# Altium PCB rev1_0.PcbDoc (part 2 of 2)
Units mm, origin at the board's own origin, x right, y up, seen from the top; angles counter-clockwise.
Board outline 99 x 99 mm, 2 copper layers (Top Layer, Bottom Layer); 120 components, 97 nets, 460 pads, 103 vias.
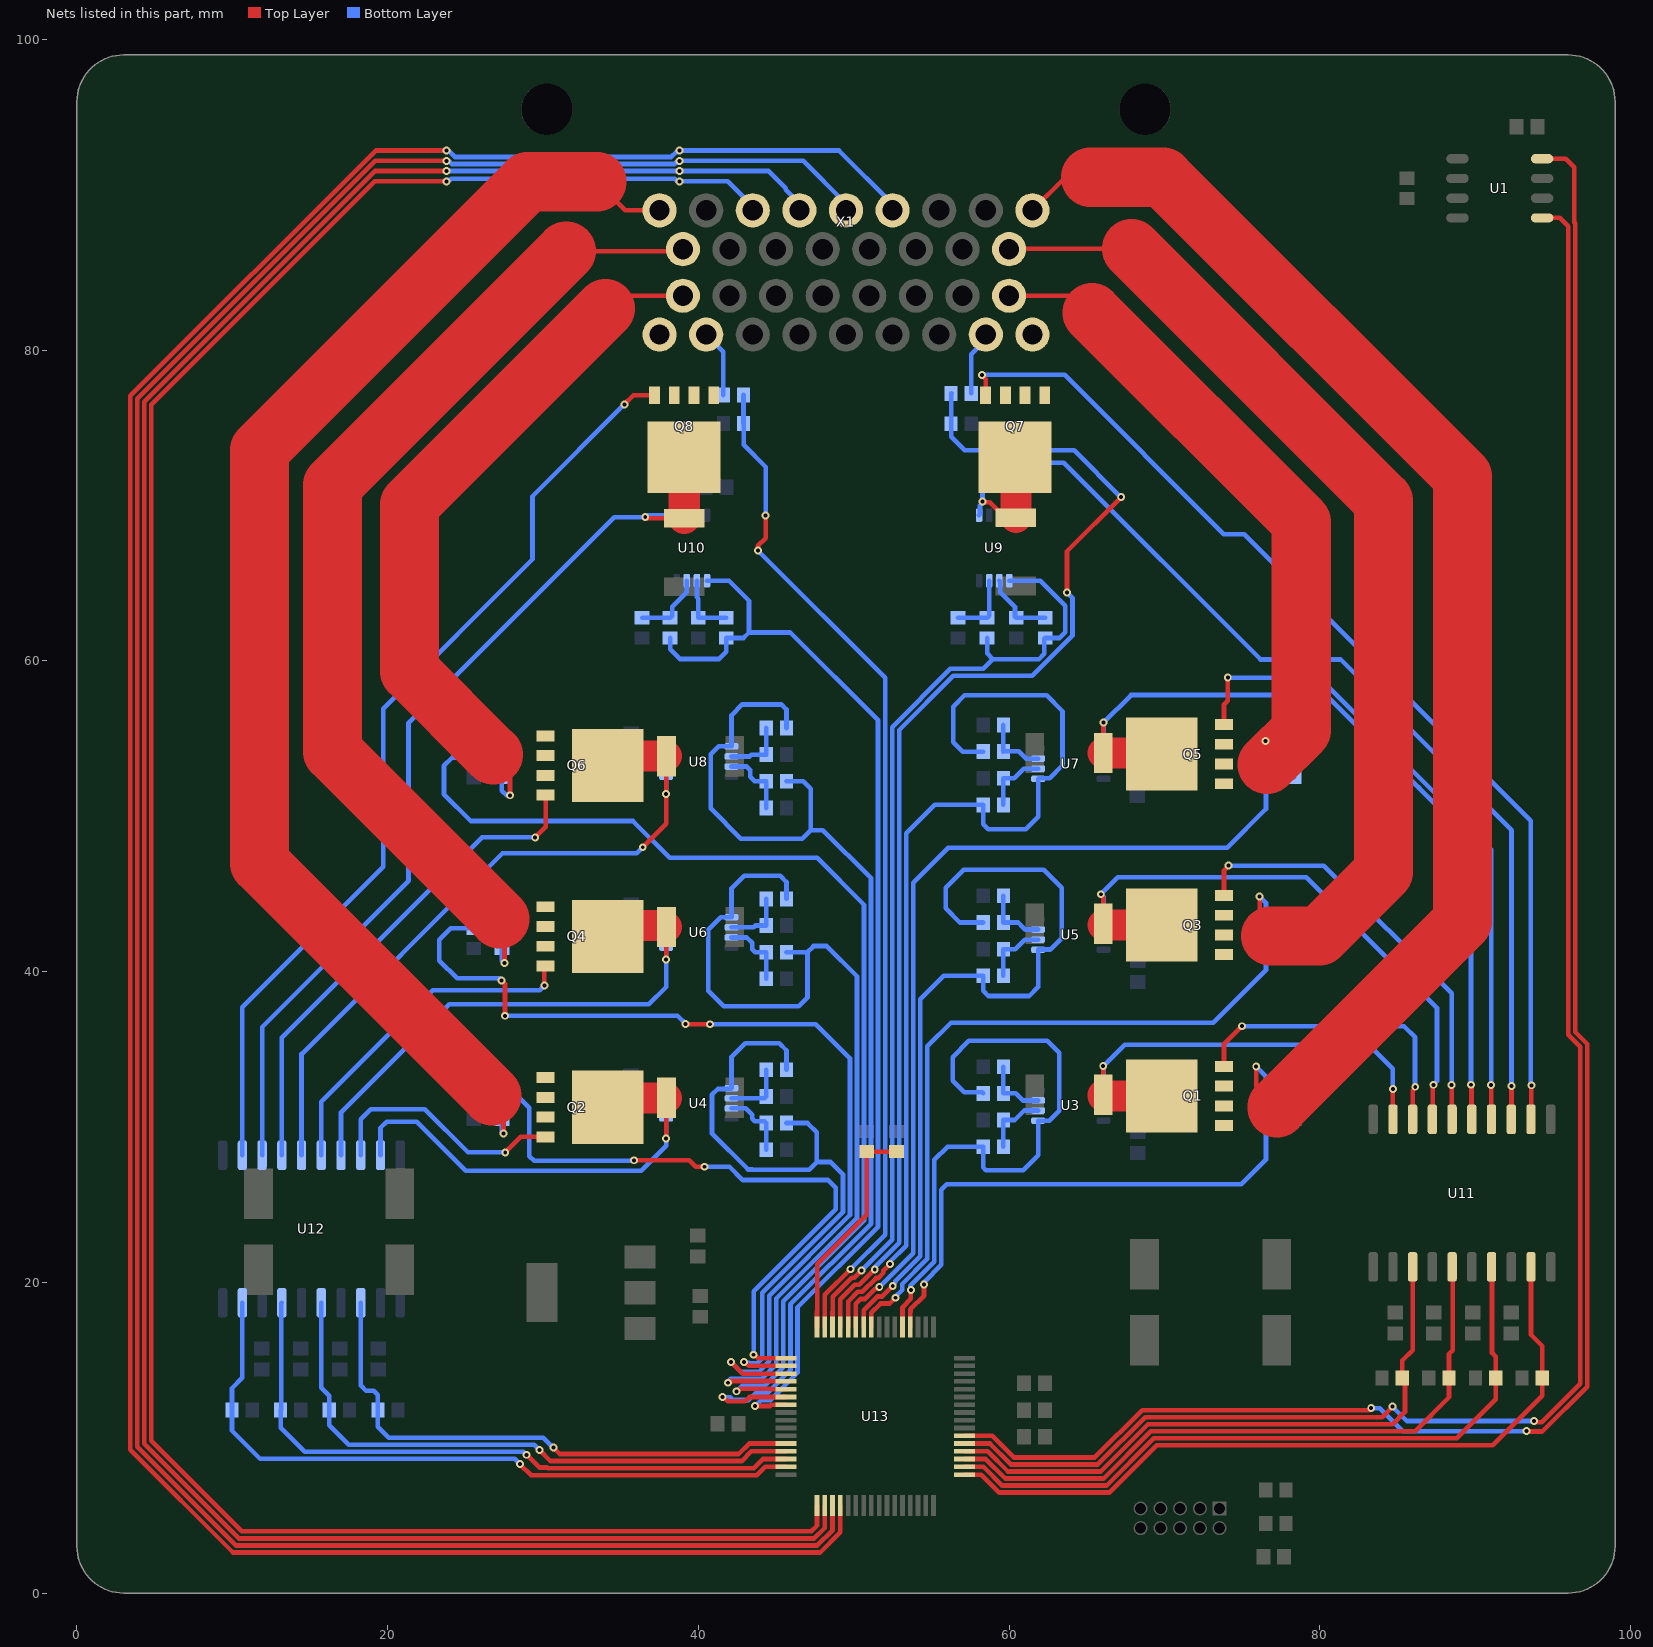
[diagram p2: the nets of this part, all layers, seen from the top]

## Via types
v1: diameter 0.508, hole 0.254, Top Layer to Bottom Layer, tented both sides, 103 vias

## Nets (pads, with @x,y where several pads share a name; then routed paths per layer and width w, separated by ;. In a path a pad name is that pad's centre, name@x,y a point inside that pad or via, vN(x,y) a via of type N, cw(c..) or ccw(c..) an arc to the next point about the centre after c; other vN are vias at no path point) (continued)
NetQ1_1: Q1.1 Q1.2 Q1.3 R7.2 X1.A26 | length 87.7
  Top Layer w0.3: X1.A26@61.5,89 63.628,91.128 65.244,91.128 ; v1(75.904,33.892) 75.904,32.583 77.25,31.237
  Top Layer w3.81: 65.244,91.128 69.916,91.128 89.176,71.868 89.176,43.223 77.25,31.297 77.25,31.237
  Bottom Layer w0.3: v1(75.904,33.892) 76.53,33.266 R7.2@76.53,31.799
NetQ1_4: Q1.4 U11.18 | length 19.9
  Top Layer w0.3: Q1.4@73.834,33.899 73.834,35.341 v1(74.978,36.485) ; U11.18@85.973,30.491 85.973,32.36 86.142,32.53 v1(86.142,32.586)
  Bottom Layer w0.3: v1(74.978,36.485) 85.417,36.485 86.128,35.774 86.128,32.6 v1(86.142,32.586)
NetQ1_5: Q1.5 R2.1 U3.1 U11.19 | length 30.4
  Top Layer w0.3: R2.1@66.056,32.067 v1(66.055,33.913) ; v1(84.701,32.442) v1(84.701,32.442) 84.702,30.492 U11.19@84.703,30.491
  Top Layer w2: R2.1@66.056,32.067 66.056,31.994 Q1.5@69.834,31.994
  Bottom Layer w0.3: U3.1@66.079,32.357 66.079,33.89 v1(66.055,33.913) 67.442,35.299 83.157,35.299 84.701,33.755 v1(84.701,32.442)
NetQ2_1: Q2.1 Q2.2 Q2.3 R14.2 X1.A34 | length 85.1
  Top Layer w0.3: 26.708,32.009 27.459,31.258 v1(27.459,29.58) ; 33.465,90.839 35.304,89 X1.A34@37.5,89
  Top Layer w3.81: 26.708,32.009 11.742,46.976 11.742,73.579 29.001,90.839 33.465,90.839
  Bottom Layer w0.3: R14.2@27.352,30.495 27.352,29.687 v1(27.459,29.58)
NetQ2_4: Q2.4 U12.18 | length 16.1
  Top Layer w0.3: v1(27.569,28.361) 28.57,29.363 Q2.4@30.166,29.363
  Bottom Layer w0.3: U12.18@18.267,28.184 18.267,30.5 18.917,31.15 22.383,31.15 25.171,28.361 v1(27.569,28.361)
NetQ2_5: Q2.5 R9.1 U4.1 U12.19 | length 31
  Top Layer w0.3: v1(37.924,29.254) 37.924,31.85 R9.1@37.944,31.871
  Top Layer w2: Q2.5@34.166,31.268 34.166,31.871 R9.1@37.944,31.871
  Bottom Layer w0.3: U12.19@19.537,28.184 19.537,29.946 19.933,30.342 21.862,30.342 25.015,27.189 36.319,27.189 37.924,28.793 v1(37.924,29.254) 37.923,29.255 U4.1@37.921,30.546 U4.1@37.921,30.546
NetQ3_1: Q3.1 Q3.2 Q3.3 R21.2 X1.A18 | length 68.7
  Top Layer w0.3: X1.A18@60,86.5 60.027,86.527 67.87,86.527 ; v1(76.125,44.825) 76.125,43.002 76.831,42.295
  Top Layer w3.81: 67.87,86.527 84.093,70.303 84.093,46.406 79.983,42.295 76.831,42.295
  Bottom Layer w0.3: v1(76.125,44.825) 76.53,44.42 R21.2@76.53,42.799
NetQ3_4: Q3.4 U11.16 | length 27.9
  Top Layer w0.3: Q3.4@73.834,44.899 73.834,46.52 v1(74.131,46.816) ; v1(88.48,32.698) 88.497,32.682 88.497,30.507 U11.16@88.513,30.491
  Bottom Layer w0.3: v1(74.131,46.816) 80.26,46.816 88.48,38.596 v1(88.48,32.698)
NetQ3_5: Q3.5 R16.1 U5.1 U11.17 | length 40.4
  Top Layer w0.3: v1(65.899,44.977) 65.899,44.92 66.056,44.764 R16.1@66.056,43.067 R16.1@66.056,42.994 ; U11.17@87.243,30.491 87.277,30.525 87.277,32.68 v1(87.311,32.714)
  Top Layer w2: R16.1@66.056,42.994 Q3.5@69.834,42.994
  Bottom Layer w0.3: U5.1@66.079,43.357 66.079,44.807 65.949,44.936 65.909,44.977 v1(65.899,44.977) 67.002,46.08 79.134,46.08 87.535,37.678 87.535,32.938 v1(87.311,32.714)
NetQ4_1: Q4.1 Q4.2 Q4.3 R28.2 X1.A25 | length 65.2
  Top Layer w0.3: 27.219,43.381 27.516,43.084 v1(27.516,40.565) ; 31.498,86.374 38.874,86.374 X1.A25@39,86.5
  Top Layer w3.81: 27.219,43.381 16.449,54.151 16.449,71.325 31.498,86.374
  Bottom Layer w0.3: R28.2@27.352,41.495 27.352,40.714 27.501,40.565 v1(27.516,40.565)
NetQ4_4: Q4.4 U12.16 | length 22.2
  Top Layer w0.3: v1(30.081,39.097) 30.081,40.279 Q4.4@30.166,40.363
  Bottom Layer w0.3: U12.16@15.727,28.184 15.727,31.616 22.911,38.8 29.784,38.8 v1(30.081,39.097)
NetQ4_5: Q4.5 R23.1 U6.1 U12.17 | length 35.8
  Top Layer w0.3: v1(37.921,40.786) 37.921,42.848 R23.1@37.944,42.871
  Top Layer w2: Q4.5@34.166,42.268 34.876,42.979 37.836,42.979 R23.1@37.944,42.871
  Bottom Layer w0.3: U12.17@16.997,28.184 16.997,30.934 23.953,37.89 36.803,37.89 37.921,39.008 v1(37.921,40.786) U6.1@37.921,41.546
NetQ5_1: Q5.1 Q5.2 Q5.3 R35.2 X1.A10 | length 42.4
  Top Layer w0.3: X1.A10@60,83.5 64.233,83.5 65.33,82.403
  Top Layer w3.81: 65.33,82.403 78.808,68.924 78.808,55.53 76.607,53.329
  Bottom Layer w0.3: v1(76.499,54.844) 76.53,54.813 R35.2@76.53,53.799
NetQ5_4: Q5.4 U11.14 | length 42
  Top Layer w0.3: Q5.4@73.834,55.899 73.834,57.205 74.074,57.445 v1(74.074,58.922) ; v1(91.023,32.703) 91.038,32.688 91.038,30.506 U11.14@91.053,30.491
  Bottom Layer w0.3: v1(74.074,58.922) 79.96,58.922 91.023,47.858 v1(91.023,32.703)
NetQ5_5: Q5.5 R30.1 U7.1 U11.15 | length 53.8
  Top Layer w0.3: R30.1@66.056,54.067 66.069,54.08 v1(66.069,56.021) ; v1(89.732,32.715) 89.757,32.689 89.757,30.517 U11.15@89.783,30.491
  Top Layer w2: R30.1@66.056,54.067 69.834,54.067 Q5.5@69.834,53.994
  Bottom Layer w0.3: U7.1@66.079,54.357 66.079,56.011 v1(66.069,56.021) 67.846,57.798 80.398,57.798 86.344,51.852 ; 86.39,51.852 86.344,51.852 ; v1(89.732,32.715) 89.732,48.465 86.344,51.852
NetQ6_1: Q6.1 Q6.2 Q6.3 R42.2 X1.A17 | length 46
  Top Layer w0.3: 26.789,53.954 27.868,52.875 v1(27.868,51.348) ; 34.028,82.683 34.844,83.5 X1.A17@39,83.5
  Top Layer w3.81: 26.789,53.954 21.408,59.335 21.408,70.064 34.028,82.683
  Bottom Layer w0.3: R42.2@27.352,52.495 27.352,51.644 27.648,51.348 v1(27.868,51.348)
NetQ6_4: Q6.4 U12.14 | length 32.2
  Top Layer w0.3: v1(29.496,48.642) 30.166,49.312 Q6.4@30.166,51.363
  Bottom Layer w0.3: U12.14@13.187,28.184 13.187,35.755 26.074,48.642 v1(29.496,48.642)
NetQ6_5: Q6.5 R37.1 U8.1 U12.15 | length 46
  Top Layer w0.3: v1(36.416,48.003) 37.926,49.513 v1(37.926,51.432) 37.926,53.852 R37.1@37.944,53.871
  Top Layer w2: Q6.5@34.166,53.268 34.166,53.871 R37.1@37.944,53.871
  Bottom Layer w0.3: U12.15@14.457,28.184 14.457,34.694 27.39,47.627 36.04,47.627 v1(36.416,48.003) ; U8.1@37.921,52.546 37.921,51.437 v1(37.926,51.432)
NetQ7_1: Q7.1 Q7.2 Q7.3 R49.2 X1.A1 X1.A2 | length 4.2
  Bottom Layer w0.3: R49.2@57.567,77.218 57.567,79.741 58.5,80.674 X1.A2@58.5,81
NetQ7_4: Q7.4 U11.12 | length 67.9
  Top Layer w0.3: v1(58.261,78.407) 58.261,78.351 58.486,78.125 Q7.4@58.486,77.097 ; U11.12@93.593,30.491 93.608,30.506 93.608,32.667 v1(93.623,32.682)
  Bottom Layer w0.3: v1(58.261,78.407) 63.571,78.407 73.825,68.153 75.124,68.153 87.768,55.509 ; 87.785,55.509 87.768,55.509 ; v1(93.623,32.682) 93.577,32.727 93.577,49.7 87.768,55.509
NetQ7_5: Q7.5 R44.1 U9.1 U11.13 | length 71.9
  Top Layer w0.3: v1(58.29,70.247) 58.33,70.207 58.748,70.207 59.739,69.217 R44.1@60.439,69.217 ; U11.13@92.323,30.491 92.331,30.5 92.331,32.639 v1(92.34,32.647)
  Top Layer w2: Q7.5@60.391,73.097 60.439,73.097 R44.1@60.439,69.217
  Bottom Layer w0.3: U9.1@58.064,69.373 58.124,69.433 58.124,70.024 58.29,70.191 v1(58.29,70.247) 58.29,71.795 59.257,72.761 63.51,72.761 76.184,60.087 81.343,60.087 87.123,54.307 ; 87.145,54.307 87.123,54.307 ; v1(92.34,32.647) 92.34,49.09 87.123,54.307
NetQ8_1: Q8.1 Q8.2 Q8.3 R56.2 X1.A8 X1.A9 | length 4.3
  Bottom Layer w0.3: X1.A8@40.5,81 41.605,79.895 R56.2@41.605,77.111
NetQ8_4: Q8.4 U12.12 | length 60.7
  Top Layer w0.3: v1(35.235,76.51) 35.823,77.097 Q8.4@37.178,77.097
  Bottom Layer w0.3: U12.12@10.647,28.184 10.647,37.691 19.704,46.748 19.704,56.917 29.322,66.535 29.322,70.597 v1(35.235,76.51)
NetQ8_5: Q8.5 R51.1 U10.1 U12.13 | length 61
  Top Layer w0.3: v1(36.58,69.25) 36.636,69.25 36.709,69.177 R51.1@39.091,69.177
  Top Layer w2: Q8.5@39.083,73.097 39.087,73.093 39.087,69.181 R51.1@39.091,69.177
  Bottom Layer w0.3: U12.13@11.917,28.184 11.917,36.435 21.343,45.861 21.343,56.011 34.582,69.25 v1(36.58,69.25) 36.636,69.25 36.759,69.373 U10.1@38.608,69.373
NetR3_1: R3.1 R5.2 U3.6 | length 4.2
  Bottom Layer w0.3: R3.1@59.632,28.73 R5.2@59.632,30.446 60.361,30.446 60.973,31.057 U3.6@61.868,31.057
NetR3_2: R3.2 R4.2 U3.5 U13.21 | length 39.5
  Top Layer w0.3: U13.21@53.134,17.122 53.134,18.103 53.14,18.109 53.14,18.399 53.677,18.937 v1(53.677,19.502)
  Bottom Layer w0.3: v1(53.677,19.502) 53.648,19.531 53.648,19.78 55.183,21.315 55.183,27.877 56.037,28.73 R3.2@58.332,28.73 58.332,27.39 58.507,27.215 60.9,27.215 61.868,28.182 U3.5@61.868,30.407 62.595,30.407 63.224,31.037 63.224,34.779 62.461,35.542 57.413,35.542 56.367,34.496 56.367,32.967 57.11,32.224 58.269,32.224 R4.2@58.332,32.161
NetR4_1: R4.1 R6.2 U3.7 | length 4.1
  Bottom Layer w0.3: R6.2@59.632,33.877 R4.1@59.632,32.161 60.435,32.161 60.55,32.047 60.889,31.707 U3.7@61.868,31.707
NetR7_1: R7.1 R8.2 U13.20 | length 35.8
  Top Layer w0.3: U13.20@53.634,17.122 53.634,18.086 53.648,18.1 53.648,18.268 54.525,19.145 v1(54.525,19.87)
  Bottom Layer w0.3: v1(54.525,19.87) 54.525,20.018 55.635,21.128 55.635,25.948 55.991,26.304 74.94,26.304 76.53,27.894 R7.1@76.53,30.499 76.537,30.506 78.339,30.506 R8.2@78.346,30.513
NetR10_1: R10.1 R12.2 U4.6 | length 4
  Bottom Layer w0.3: U4.6@42.132,31.846 44.249,31.846 R12.2@44.368,31.965 R10.1@44.368,33.681
NetR10_2: R10.2 R11.2 U4.5 U13.34 | length 43.5
  Top Layer w0.3: v1(42.933,14.87) 42.989,14.87 43.233,14.627 44.657,14.627 44.661,14.622 U13.34@45.634,14.622
  Bottom Layer w0.3: v1(42.933,14.87) 42.973,14.83 43.277,14.83 43.328,14.78 43.789,14.78 44.115,15.106 44.115,19.332 49.302,24.52 49.302,26.964 48.524,27.741 47.619,27.741 ; R11.2@45.668,30.25 47.024,30.25 47.619,29.654 47.619,27.741 ; R10.2@45.668,33.681 45.668,34.92 45.2,35.389 43.007,35.389 42.132,34.514 U4.5@42.132,32.496 42.08,32.443 41.253,32.443 40.873,32.064 40.873,29.581 43.195,27.26 43.472,27.26 43.487,27.245 47.122,27.245 47.619,27.741
NetR11_1: R11.1 R13.2 U4.7 | length 4.5
  Bottom Layer w0.3: U4.7@42.132,31.196 43.049,31.196 43.208,31.037 43.457,30.787 43.457,30.538 43.633,30.362 44.256,30.362 R11.1@44.368,30.25 R13.2@44.368,28.534
NetR14_1: R14.1 R15.2 U13.33 | length 42.7
  Top Layer w0.3: v1(35.843,27.855) 39.408,27.855 39.826,27.437 v1(40.389,27.437) ; v1(43.558,15.336) 43.614,15.336 43.845,15.106 44.656,15.106 44.673,15.122 U13.33@45.634,15.122
  Bottom Layer w0.3: R15.2@25.536,31.781 25.543,31.788 27.345,31.788 R14.1@27.352,31.795 28.569,31.795 29.118,31.247 29.118,28.125 29.426,27.817 35.804,27.817 v1(35.843,27.855) ; v1(40.389,27.437) 42.003,27.437 42.857,26.583 48.366,26.583 48.849,26.1 48.849,24.707 43.558,19.416 v1(43.558,15.336)
NetR17_1: R17.1 R19.2 U5.6 | length 4.2
  Bottom Layer w0.3: R17.1@59.632,39.73 R19.2@59.632,41.446 60.395,41.446 61.007,42.057 U5.6@61.868,42.057
NetR17_2: R17.2 R18.2 U5.5 U13.26 | length 52.4
  Top Layer w0.3: U13.26@50.634,17.122 50.634,18.193 51.532,19.09 51.826,19.09 52.501,19.765 v1(52.508,19.765)
  Bottom Layer w0.3: v1(52.508,19.765) 52.508,19.822 52.669,19.982 52.669,20.08 54.278,21.69 54.278,38.221 55.787,39.73 R17.2@58.332,39.73 58.332,38.757 58.658,38.431 61.285,38.431 61.868,39.013 U5.5@61.868,41.407 61.879,41.418 62.657,41.418 63.388,42.149 63.388,45.394 62.236,46.545 57.066,46.545 55.914,45.393 55.914,44.076 56.829,43.161 R18.2@58.332,43.161
NetR18_1: R18.1 R20.2 U5.7 | length 4.1
  Bottom Layer w0.3: R20.2@59.632,44.877 R18.1@59.632,43.161 60.588,43.161 60.89,42.859 61.042,42.707 U5.7@61.868,42.707
NetR21_1: R21.1 R22.2 U13.25 | length 47
  Top Layer w0.3: U13.25@51.134,17.122 51.134,18.049 51.724,18.638 52.312,18.638 v1(52.682,19.008)
  Bottom Layer w0.3: v1(52.682,19.008) 52.682,19.064 53.121,19.504 53.121,19.893 54.731,21.503 54.731,35.181 56.257,36.707 73.137,36.707 76.53,40.1 R21.1@76.53,41.499 76.537,41.506 78.339,41.506 R22.2@78.346,41.513
NetR24_1: R24.1 R26.2 U6.6 | length 4
  Bottom Layer w0.3: U6.6@42.132,42.846 43.549,42.846 43.668,42.965 R26.2@44.368,42.965 R24.1@44.368,44.681
NetR24_2: R24.2 R25.2 U6.5 U13.36 | length 62.8
  Top Layer w0.3: v1(41.898,13.536) 41.954,13.536 42.065,13.647 44.654,13.647 44.679,13.622 U13.36@45.634,13.622
  Bottom Layer w0.3: v1(41.898,13.536) 41.898,13.592 41.986,13.68 41.986,13.694 42.068,13.776 44.065,13.776 45.019,14.731 45.019,18.958 50.207,24.145 50.207,39.692 48.255,41.643 47.413,41.643 47.02,41.25 ; R25.2@45.668,41.25 47.02,41.25 ; R24.2@45.668,44.681 45.668,45.763 45.256,46.175 42.94,46.175 42.132,45.367 U6.5@42.132,43.496 41.446,43.496 40.644,42.695 40.644,38.755 41.636,37.764 46.455,37.764 47.02,38.328 47.02,41.25
NetR25_1: R25.1 R27.2 U6.7 | length 4.6
  Bottom Layer w0.3: U6.7@42.132,42.196 43.119,42.196 43.473,41.843 43.473,41.425 43.648,41.25 R25.1@44.368,41.25 R27.2@44.368,39.534
NetR28_1: R28.1 R29.2 U13.35 | length 64.5
  Top Layer w0.3: v1(27.316,39.433) 27.549,39.2 v1(27.549,37.155) ; v1(39.172,36.637) 39.198,36.611 v1(40.751,36.611) ; v1(42.086,14.876) 42.845,14.117 44.657,14.117 44.663,14.122 U13.35@45.634,14.122
  Bottom Layer w0.3: v1(27.316,39.433) 27.187,39.562 24.469,39.562 23.33,40.701 23.33,42.047 24.064,42.781 R29.2@25.536,42.781 25.543,42.788 27.345,42.788 R28.1@27.352,42.795 ; v1(27.549,37.155) 38.654,37.155 v1(39.172,36.637) ; v1(40.751,36.611) 47.559,36.611 49.754,34.416 49.754,24.332 44.567,19.145 44.567,14.918 43.877,14.229 42.733,14.229 v1(42.086,14.876)
NetR31_1: R31.1 R33.2 U7.6 | length 4.2
  Bottom Layer w0.3: R31.1@59.632,50.73 R33.2@59.632,52.446 60.331,52.446 60.943,53.057 U7.6@61.868,53.057
NetR31_2: R31.2 R32.2 U7.5 U13.28 | length 64.6
  Top Layer w0.3: U13.28@49.634,17.122 49.634,18.767 50.249,19.382 50.544,19.382 51.435,20.274 51.582,20.274 51.908,20.6 51.908,20.747 v1(52.333,21.172)
  Bottom Layer w0.3: v1(52.333,21.172) 52.333,21.319 53.373,22.359 53.373,48.893 55.21,50.73 R31.2@58.332,50.73 58.332,49.488 58.658,49.161 61.068,49.161 61.868,49.961 U7.5@61.868,52.407 61.906,52.446 62.613,52.446 63.437,53.269 63.437,56.753 62.409,57.781 57.129,57.781 56.399,57.051 56.399,54.768 57.006,54.161 R32.2@58.332,54.161
NetR32_1: R32.1 R34.2 U7.7 | length 4.2
  Bottom Layer w0.3: R34.2@59.632,55.877 R32.1@59.632,54.161 59.651,54.18 60.614,54.18 60.942,53.852 61.087,53.707 U7.7@61.868,53.707
NetR35_1: R35.1 R36.2 U13.27 | length 58.9
  Top Layer w0.3: U13.27@50.134,17.122 50.134,18.627 50.437,18.93 50.731,18.93 51.392,19.59 51.483,19.59 51.587,19.694 v1(51.643,19.694)
  Bottom Layer w0.3: v1(51.643,19.694) 53.826,21.877 53.826,45.721 56.068,47.963 74.027,47.963 76.53,50.466 R35.1@76.53,52.499 76.537,52.506 78.339,52.506 R36.2@78.346,52.513
NetR38_1: R38.1 R40.2 U8.6 | length 4
  Bottom Layer w0.3: U8.6@42.132,53.846 43.289,53.846 43.408,53.965 R40.2@44.368,53.965 R38.1@44.368,55.681
NetR38_2: R38.2 R39.2 U8.5 U13.38 | length 72.6
  Top Layer w0.3: v1(41.553,12.623) 41.61,12.623 41.887,12.346 43.024,12.346 43.291,12.614 44.633,12.614 44.642,12.622 U13.38@45.634,12.622
  Bottom Layer w0.3: v1(41.553,12.623) 41.593,12.584 42.063,12.584 42.218,12.429 43.25,12.429 43.693,12.872 44.439,12.872 45.924,14.356 45.924,18.583 51.111,23.77 51.111,46 48.003,49.108 47.231,49.108 ; R39.2@45.668,52.25 46.75,52.25 47.231,51.769 47.231,49.108 ; R38.2@45.668,55.681 45.668,56.865 45.34,57.194 42.816,57.194 42.132,56.51 U8.5@42.132,54.496 41.307,54.496 40.795,53.985 40.795,50.501 42.735,48.561 46.684,48.561 47.231,49.108
NetR39_1: R39.1 R41.2 U8.7 | length 4.6
  Bottom Layer w0.3: U8.7@42.132,53.196 43.107,53.196 43.33,52.973 43.33,52.535 43.615,52.25 R39.1@44.368,52.25 R41.2@44.368,50.534
NetR42_1: R42.1 R43.2 U13.37 | length 74.6
  Top Layer w0.3: v1(42.448,12.985) 42.504,12.985 42.676,13.157 44.657,13.157 44.692,13.122 U13.37@45.634,13.122
  Bottom Layer w0.3: R42.1@27.352,53.795 27.345,53.788 25.543,53.788 R43.2@25.536,53.781 24.164,53.781 23.62,53.237 23.62,51.417 25.345,49.692 35.786,49.692 38.157,47.321 47.64,47.321 50.659,44.303 50.659,23.957 45.472,18.77 45.472,14.544 44.252,13.324 42.786,13.324 v1@42.448,12.986
NetR45_1: R45.1 R47.2 U9.6 | length 4.7
  Bottom Layer w0.3: U9.6@59.364,65.162 59.424,65.102 59.424,64.426 60.374,63.475 60.374,62.853 R47.2@60.451,62.775 R45.1@62.322,62.775
NetR45_2: R45.2 R46.2 U9.5 U13.30 | length 62
  Top Layer w0.3: U13.30@48.634,17.122 48.634,18.089 48.645,18.1 48.645,19.057 49.875,20.287 50.022,20.287 v1(50.504,20.77)
  Bottom Layer w0.3: v1(50.504,20.77) 52.469,22.734 52.469,55.737 56.221,59.489 58.327,59.489 58.948,60.11 ; R46.2@58.581,61.475 58.581,60.477 58.948,60.11 ; U9.5@60.014,65.162 62.003,65.162 63.623,63.541 63.623,61.838 63.26,61.475 R45.2@62.322,61.475 62.27,61.424 62.27,60.456 61.924,60.11 58.948,60.11
NetR46_1: R46.1 R48.2 U9.7 | length 4.3
  Bottom Layer w0.3: R48.2@56.711,62.775 R46.1@58.581,62.775 58.714,62.908 U9.7@58.714,65.162
NetR49_1: R49.1 R50.2 U13.29 | length 79.7
  Top Layer w0.3: U13.29@49.134,17.122 49.134,18.234 49.137,18.236 49.137,18.909 50.062,19.834 50.356,19.834 51.061,20.539 51.061,20.55 51.341,20.83 v1(51.352,20.83) ; v1(63.724,64.41) 63.724,67.053 v1(67.215,70.543)
  Bottom Layer w0.3: v1(51.352,20.83) 51.352,20.977 52.921,22.546 52.921,55.549 56.409,59.037 61.49,59.037 64.075,61.622 64.075,64.058 v1(63.724,64.41) ; R49.1@56.267,77.218 R50.2@56.267,75.26 56.267,74.421 57.131,73.557 64.179,73.557 67.193,70.543 v1(67.215,70.543) ; R49.1@56.277,77.218 R49.1@56.288,77.23
NetR52_1: R52.1 R54.2 U10.6 | length 4.2
  Bottom Layer w0.3: U10.6@39.908,65.162 39.908,64.095 40.001,64.003 40.001,62.793 R54.2@39.983,62.775 R52.1@41.786,62.775
NetR52_2: R52.2 R53.2 U10.5 U13.39 | length 73
  Top Layer w0.3: v1(43.651,12.043) 44.605,12.043 44.685,12.122 U13.39@45.634,12.122
  Bottom Layer w0.3: R53.2@38.18,61.475 38.18,60.751 38.806,60.125 41.333,60.125 41.786,60.578 R52.2@41.786,61.475 42.903,61.475 43.255,61.828 ; U10.5@40.558,65.162 41.968,65.162 43.255,63.874 43.255,61.828 ; v1(43.651,12.043) 44.027,12.419 44.627,12.419 46.377,14.169 46.377,18.395 51.564,23.583 51.564,56.18 45.917,61.828 43.255,61.828
NetR53_1: R53.1 R55.2 U10.7 | length 4.6
  Bottom Layer w0.3: R55.2@36.377,62.775 R53.1@38.18,62.775 38.317,62.912 38.317,63.475 39.258,64.416 U10.7@39.258,65.162
NetR56_1: R56.1 R57.2 U13.31 | length 65.8
  Top Layer w0.3: v1(43.833,67.105) 43.833,67.401 44.328,67.896 v1(44.328,69.363) ; U13.31@48.134,17.122 48.134,18.134 48.14,18.14 48.14,19.192 v1(49.791,20.843)
  Bottom Layer w0.3: R56.1@42.905,77.111 42.907,77.109 42.907,75.278 R57.2@42.909,75.276 42.909,73.897 44.328,72.478 v1(44.328,69.363) ; v1(43.833,67.105) 52.016,58.922 52.016,23.068 v1(49.791,20.843)
NetR58_2: R58.2 U11.3 U13.4 | length 40.1
  Top Layer w0.3: U13.4@57.134,9.122 58.628,9.122 59.927,7.824 65.893,7.824 68.94,10.871 84.69,10.871 85.476,11.657 85.476,13.68 R58.2@85.308,13.849 85.308,14.966 85.973,15.631 U11.3@85.973,20.991
NetR59_2: R59.2 U11.5 U13.3 | length 42.4
  Top Layer w0.3: U13.3@57.134,8.622 58.489,8.622 59.74,7.371 66.08,7.371 69.128,10.419 86.131,10.419 88.312,12.6 R59.2@88.312,13.849 88.312,15.393 88.555,15.636 88.555,20.949 U11.5@88.513,20.991
NetR60_2: R60.2 U11.7 U13.2 | length 45.6
  Top Layer w0.3: U13.2@57.134,8.122 58.349,8.122 59.552,6.919 66.268,6.919 69.315,9.966 88.823,9.966 91.316,12.459 R60.2@91.316,13.849 91.316,15.221 91.083,15.454 91.083,20.961 U11.7@91.053,20.991
NetR61_2: R61.2 U11.9 U13.1 | length 48.8
  Top Layer w0.3: U13.1@57.134,7.622 58.209,7.622 59.365,6.467 66.455,6.467 69.502,9.514 91.127,9.514 94.32,12.707 R61.2@94.32,13.849 94.32,15.902 93.593,16.629 U11.9@93.593,20.991
NetR62_2: R62.2 U12.3 U13.44 | length 36
  Top Layer w0.3: v1(30.669,9.355) 31.076,8.948 42.593,8.948 43.268,9.622 U13.44@45.634,9.622
  Bottom Layer w0.3: U12.3@18.267,18.684 18.267,13.363 18.605,13.025 19.109,13.025 19.37,12.764 R62.2@19.37,11.777 19.37,10.693 20.061,10.003 26.005,10.003 30.021,10.003 v1(30.669,9.355)
NetR63_2: R63.2 U12.5 U13.45 | length 38.7
  Top Layer w0.3: v1(29.761,9.215) 30.48,8.495 42.78,8.495 43.408,9.122 U13.45@45.634,9.122
  Bottom Layer w0.3: U12.5@15.727,18.684 15.727,13.213 16.24,12.701 R63.2@16.24,11.777 16.24,10.812 17.501,9.55 29.425,9.55 v1(29.761,9.215)
NetR64_2: R64.2 U12.7 U13.46 | length 41.9
  Top Layer w0.3: v1(28.942,8.899) 29.757,8.084 30.252,8.084 30.293,8.043 43.574,8.043 44.153,8.622 U13.46@45.634,8.622
  Bottom Layer w0.3: U12.7@13.187,18.684 13.148,18.645 13.148,11.817 R64.2@13.109,11.777 13.109,10.642 14.653,9.098 28.743,9.098 v1(28.942,8.899)
NetR65_2: R65.2 U12.9 U13.47 | length 45.6
  Top Layer w0.3: v1(28.514,8.303) 29.227,7.59 43.761,7.59 44.293,8.122 U13.47@45.634,8.122
  Bottom Layer w0.3: U12.9@10.647,18.684 10.647,13.86 9.978,13.191 R65.2@9.978,11.777 9.978,10.45 11.782,8.646 28.172,8.646 v1(28.514,8.303)
NetR68_1: R68.1 R69.2 U13.32 | length 14.5
  Top Layer w0.3: U13.32@47.634,17.122 47.634,18.131 47.649,18.146 47.649,21.161 50.833,24.344 R68.1@50.833,28.412 R69.2@52.75,28.412
NetU1_1: U1.1 U13.5 | length 119.9
  Top Layer w0.3: U13.5@57.134,9.622 58.768,9.622 60.114,8.276 65.705,8.276 68.753,11.324 84.005,11.324 v1(84.676,11.996) ; v1(93.786,11.073) 93.856,11.004 94.292,11.004 96.751,13.463 96.751,35.15 95.978,35.924 95.978,87.981 95.447,88.511 U1.1@94.306,88.511
  Bottom Layer w0.3: v1(84.676,11.996) 85.599,11.073 v1(93.786,11.073)
NetU1_4: U1.4 U13.6 | length 124.9
  Top Layer w0.3: U13.6@57.134,10.122 58.908,10.122 60.302,8.729 65.518,8.729 68.565,11.776 83.213,11.776 83.307,11.869 v1(83.307,11.898) ; v1(93.304,10.419) 93.327,10.396 94.324,10.396 97.204,13.276 97.204,35.338 96.43,36.111 96.43,88.168 96.38,88.218 96.38,91.768 95.827,92.321 U1.4@94.306,92.321
  Bottom Layer w0.3: v1(83.307,11.898) 83.868,11.898 85.347,10.419 v1(93.304,10.419)
NetU13_49: U13.49 X1.A32 | length 159.2
  Top Layer w0.3: v1(23.785,90.866) 19.159,90.866 4.783,76.49 4.783,9.792 10.607,3.968 47.275,3.968 47.634,4.327 U13.49@47.634,5.622
  Bottom Layer w0.3: v1(23.785,90.866) 23.841,90.866 23.945,90.97 24.015,90.97 24.087,91.042 38.484,91.042 38.62,90.906 38.747,90.906 v1(38.786,90.866) 41.899,90.866 43.5,89.265 X1.A32@43.5,89
NetU13_50: U13.50 X1.A31 | length 164.8
  Top Layer w0.3: v1(23.785,91.526) 19.18,91.526 4.331,76.677 4.331,9.604 10.419,3.515 47.462,3.515 48.134,4.187 U13.50@48.134,5.622
  Bottom Layer w0.3: v1(23.785,91.526) v1(38.786,91.526) 44.519,91.526 45.631,90.414 45.631,90.323 46.5,89.455 X1.A31@46.5,89
NetU13_51: U13.51 X1.A30 | length 170.5
  Top Layer w0.3: v1(23.785,92.187) 19.201,92.187 3.878,76.864 3.878,9.417 10.232,3.063 47.65,3.063 48.634,4.048 U13.51@48.634,5.622
  Bottom Layer w0.3: v1(23.785,92.187) 23.825,92.147 23.951,92.147 24.115,91.983 38.456,91.983 38.556,92.083 38.626,92.083 38.73,92.187 v1(38.786,92.187) 46.747,92.187 49.5,89.434 X1.A30@49.5,89
NetU13_52: U13.52 X1.A29 | length 176.3
  Top Layer w0.3: v1(23.785,92.847) 19.221,92.847 3.426,77.052 3.426,9.229 10.045,2.611 47.837,2.611 49.134,3.908 U13.52@49.134,5.622
  Bottom Layer w0.3: v1(23.785,92.847) 23.825,92.807 23.951,92.807 24.323,92.435 38.248,92.435 38.556,92.743 38.626,92.743 38.73,92.847 v1(38.786,92.847) 49.049,92.847 52.5,89.396 X1.A29@52.5,89
pads on no net: U1.5 U13.11 U13.12 U13.13 U13.14 U13.15 U13.16 U13.17 U13.18 U13.19 U13.22 U13.23 U13.24 U13.42 U13.43 U13.48 U13.53 U13.54 U13.55 U13.56 U13.57 U13.59 U13.60 X1.MH X2.7 X2.9

## Polygon pours and split planes (outlines as drawn)
GND on Top Layer "GND_L01_P025" (solid, pour order 25): 0,96.46 cw(c2.54,96.46) 2.54,99 96.46,99 cw(c96.46,96.46) 99,96.46 99,2.54 cw(c96.46,2.54) 96.46,0 2.54,0 cw(c2.54,2.54) 0,2.54
12V on Top Layer "12V_L01_P021" (solid, pour order 21): 55.533,82.159 46.056,82.159 45.248,81.35 45.248,33.33 48.227,30.35 50.263,32.386 52.259,34.007 58.431,34.007 58.431,66.072 56.557,67.946 56.557,81.499 55.897,82.159
NetQ1_1 on Top Layer "NETQ1_1_L01_P014" (solid, pour order 14): 76.581,33.189 72.591,33.189 72.608,29.367 77.167,29.367
NetQ3_1 on Top Layer "NETQ3_1_L01_P013" (solid, pour order 13): 76.433,44.199 72.916,44.199 72.933,40.377 76.581,40.533
NetQ5_1 on Top Layer "NETQ5_1_L01_P012" (solid, pour order 12): 77.252,55.232 72.706,55.288 72.723,51.466 76.975,51.466
NetQ2_1 on Top Layer "NETQ2_1_L01_P011" (solid, pour order 11): 27.873,33.529 30.986,33.663 30.969,29.841 26.605,30.12
NetQ4_1 on Top Layer "NETQ4_1_L01_P010" (solid, pour order 10): 27.702,44.584 31.184,44.761 31.167,40.939 27.115,41.506
NetQ6_1 on Top Layer "NETQ6_1_L01_P009" (solid, pour order 9): 26.654,55.768 31.201,55.825 31.183,52.003 25.802,52.491
NetQ2_1 on Top Layer "NETQ2_1_L01_P008" (solid, pour order 8): 36.523,88.084 37.524,87.817 38.403,88.106 38.832,89.5 37.976,91.062 33.767,92.742 33.598,88.985
NetQ4_1 on Top Layer "NETQ4_1_L01_P007" (solid, pour order 7): 39.226,88.194 40.249,86.683 40.049,85.693 39.226,85.27 32.898,85.159 30.595,88.095 31.552,88.329 36.825,87.834
NetQ6_1 on Top Layer "NETQ6_1_L01_P006" (solid, pour order 6): 39.063,82.367 39.646,82.404 40.148,83.079 40.12,84.434 39.454,85.26 33.617,84.593 35.45,81.492 37.056,82.404
NetQ5_1 on Top Layer "NETQ5_1_L01_P005" (solid, pour order 5): 59.331,84.91 60.021,85.123 61.243,85.423 65.463,84.387 66.423,84.016 63.736,81.419 61.702,82.493 59.476,82.391 58.84,83.206
NetQ3_1 on Top Layer "NETQ3_1_L01_P004" (solid, pour order 4): 60.091,88.164 59.557,88.019 58.751,86.55 58.84,85.878 59.277,85.31 60.388,85.263 61.31,85.712 66.344,85.452 68.193,88.395 65.167,88.767 62.586,87.674 61.818,87.674
NetQ1_1 on Top Layer "NETQ1_1_L01_P003" (solid, pour order 3): 60.755,90.688 61.024,87.792 61.112,87.724 62.035,87.756 65.026,89.268 65.09,93.055 63.674,92.816
NetQ7_1 on Top Layer "NETQ7_1_L01_P001" (solid, pour order 1): 57.372,82.07 61.936,82.048 63.342,81.318 62.855,76.084 59.213,76.115 59.014,78.477 56.777,80.359 56.776,81.516
NetQ8_1 on Top Layer "NETQ8_1_L01_P000" (solid, pour order 0): 37.472,82.14 40.84,82.163 42.054,81.509 42.156,81.258 42.055,76.276 37.903,76.288 37.863,77.994 35.91,80.302 35.91,81.398 36.353,81.974
GND on Bottom Layer "GND_L02_P024" (solid, pour order 24): 0,96.46 cw(c2.54,96.46) 2.54,99 96.46,99 cw(c96.46,96.46) 99,96.46 99,2.54 cw(c96.46,2.54) 96.46,0 2.54,0 cw(c2.54,2.54) 0,2.54

## Keep-outs
Keep-Out Layer:
  the board outline again, w1.2

## Other copper
Top Layer:
  pour cut-out: 91,5 cw(c93,5) 93,7 cw(c93,5) 95,5 cw(c93,5) 93,3 cw(c93,5) 91,5
  pour cut-out: 95,7 ccw(c96,7) 96,6 ccw(c96,7) 97,7 ccw(c96,7) 96,8 ccw(c96,7)
  pour cut-out: 85,6 ccw(c85,7) 86,7 ccw(c85,7) 85,8 ccw(c85,7) 84,7 ccw(c85,7)
  pour cut-out: 90,5 ccw(c88,5) 88,7 ccw(c88,5) 86,5 ccw(c88,5) 88,3 ccw(c88,5)
Bottom Layer:
  pour cut-out: 85,6 ccw(c85,7) 86,7 ccw(c85,7) 85,8 ccw(c85,7) 84,7 ccw(c85,7)
  pour cut-out: 95,7 ccw(c96,7) 96,6 ccw(c96,7) 97,7 ccw(c96,7) 96,8 ccw(c96,7)
  pour cut-out: 91,5 cw(c93,5) 93,7 cw(c93,5) 95,5 cw(c93,5) 93,3 cw(c93,5) 91,5
  pour cut-out: 90,5 ccw(c88,5) 88,7 ccw(c88,5) 86,5 ccw(c88,5) 88,3 ccw(c88,5)